# EAGLE board SparkFun_TensorFlow_Ambiq_Apollo3-Panel (EAGLE 9.4.2), part 1 of 4
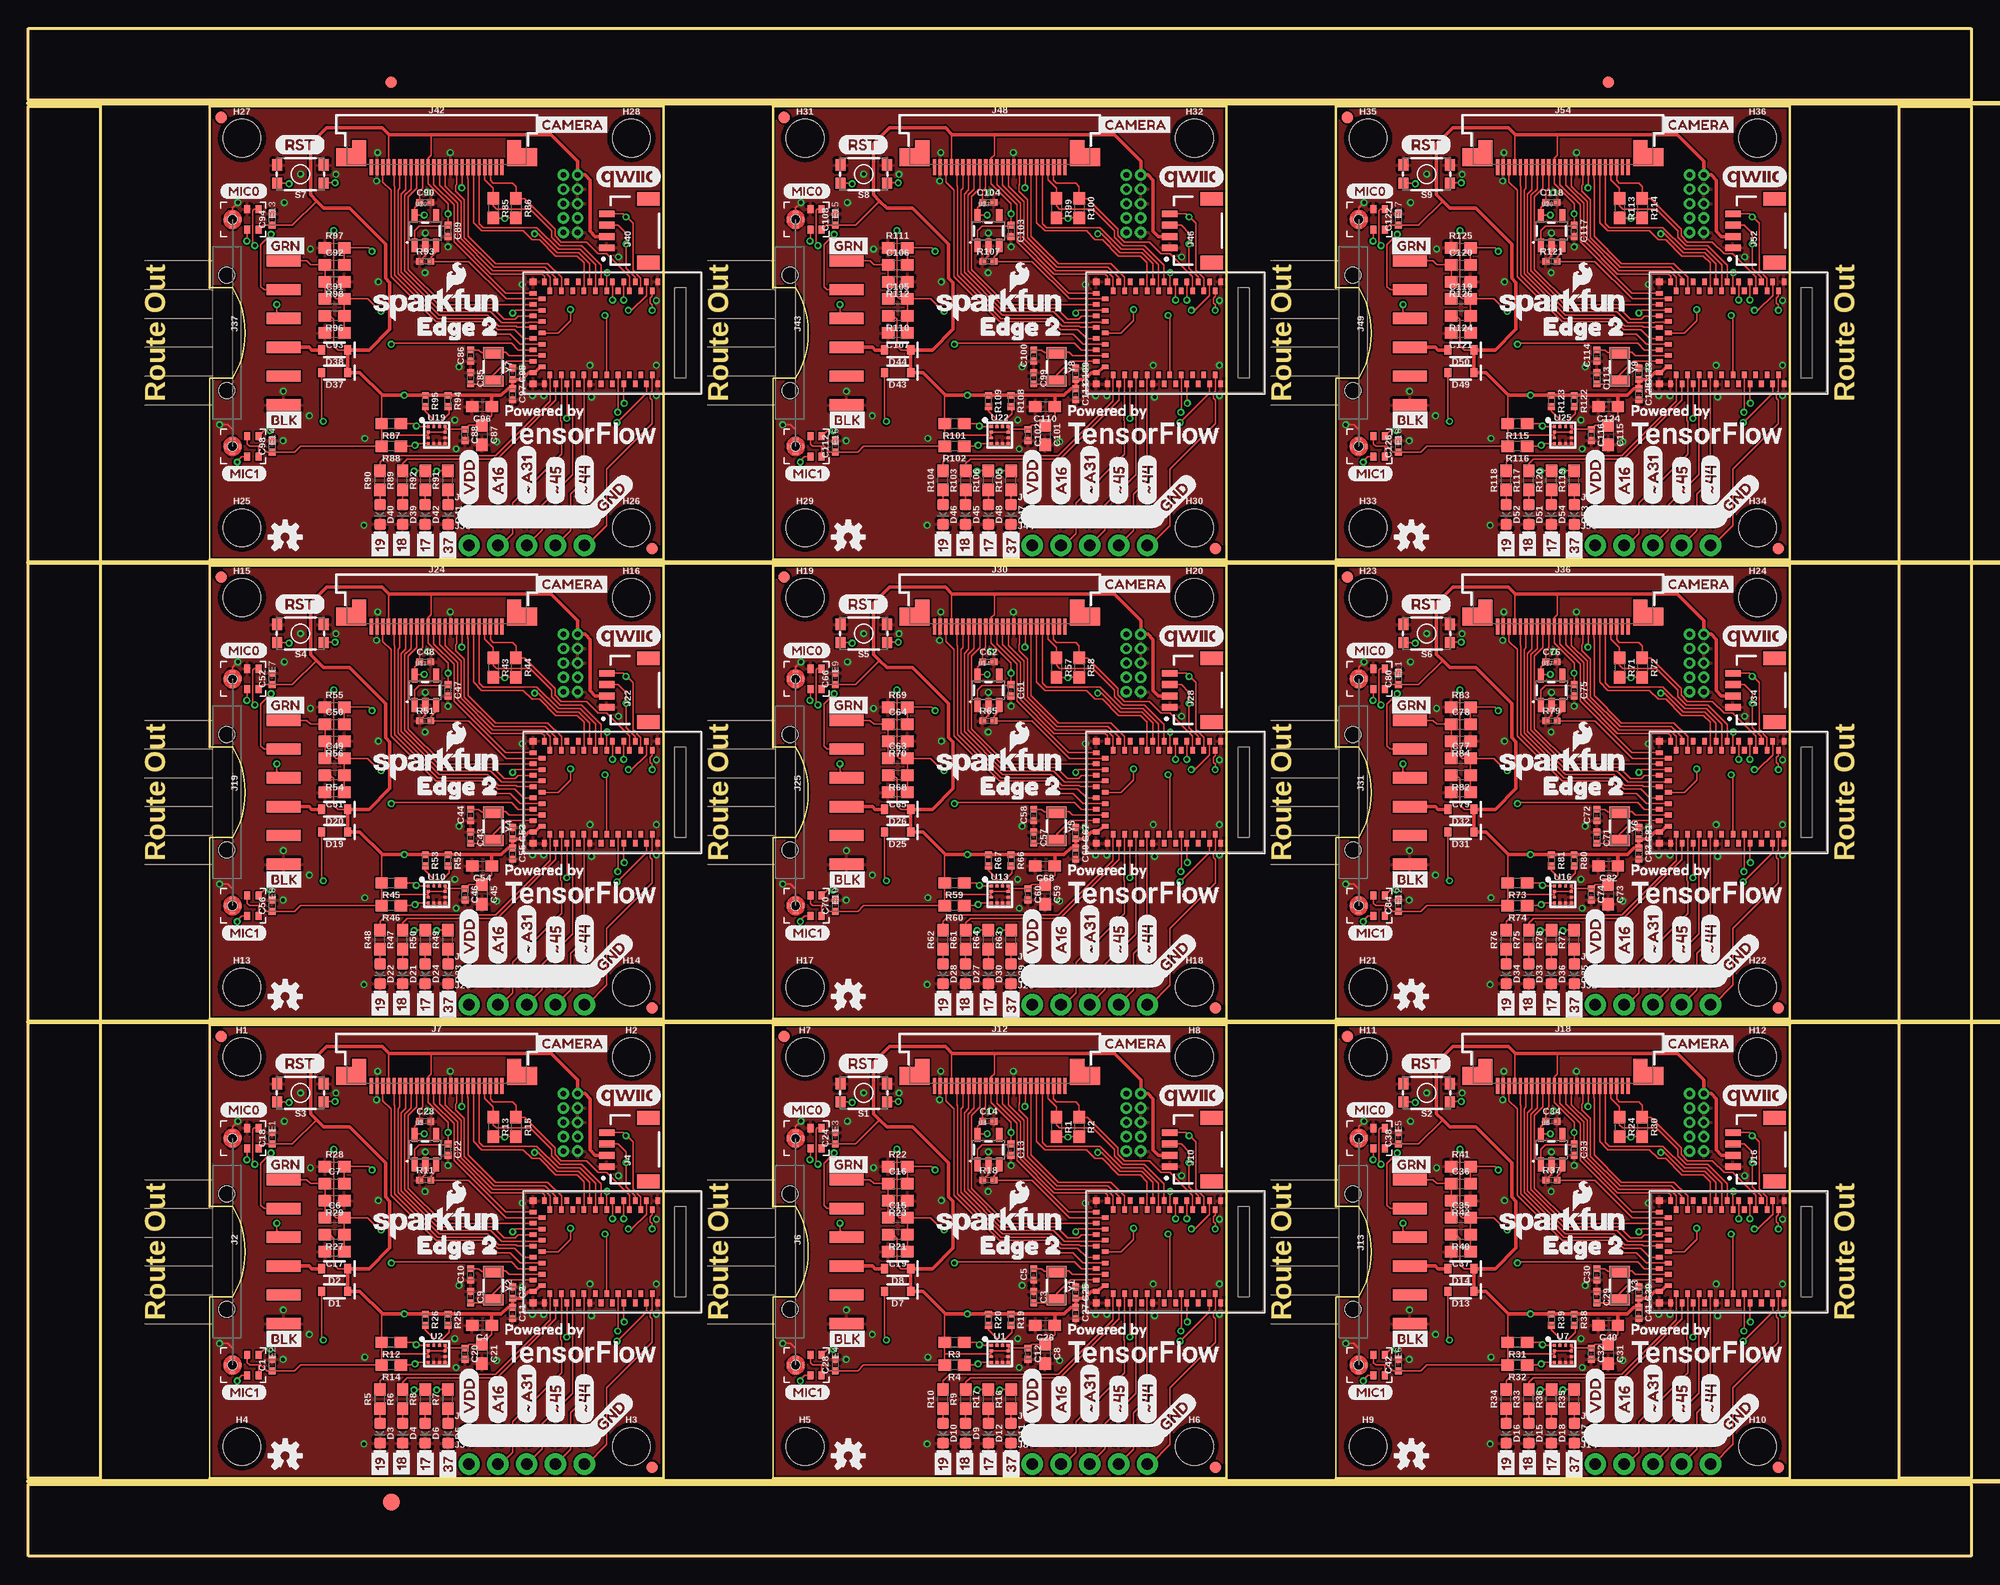
[diagram p0: board, top side]
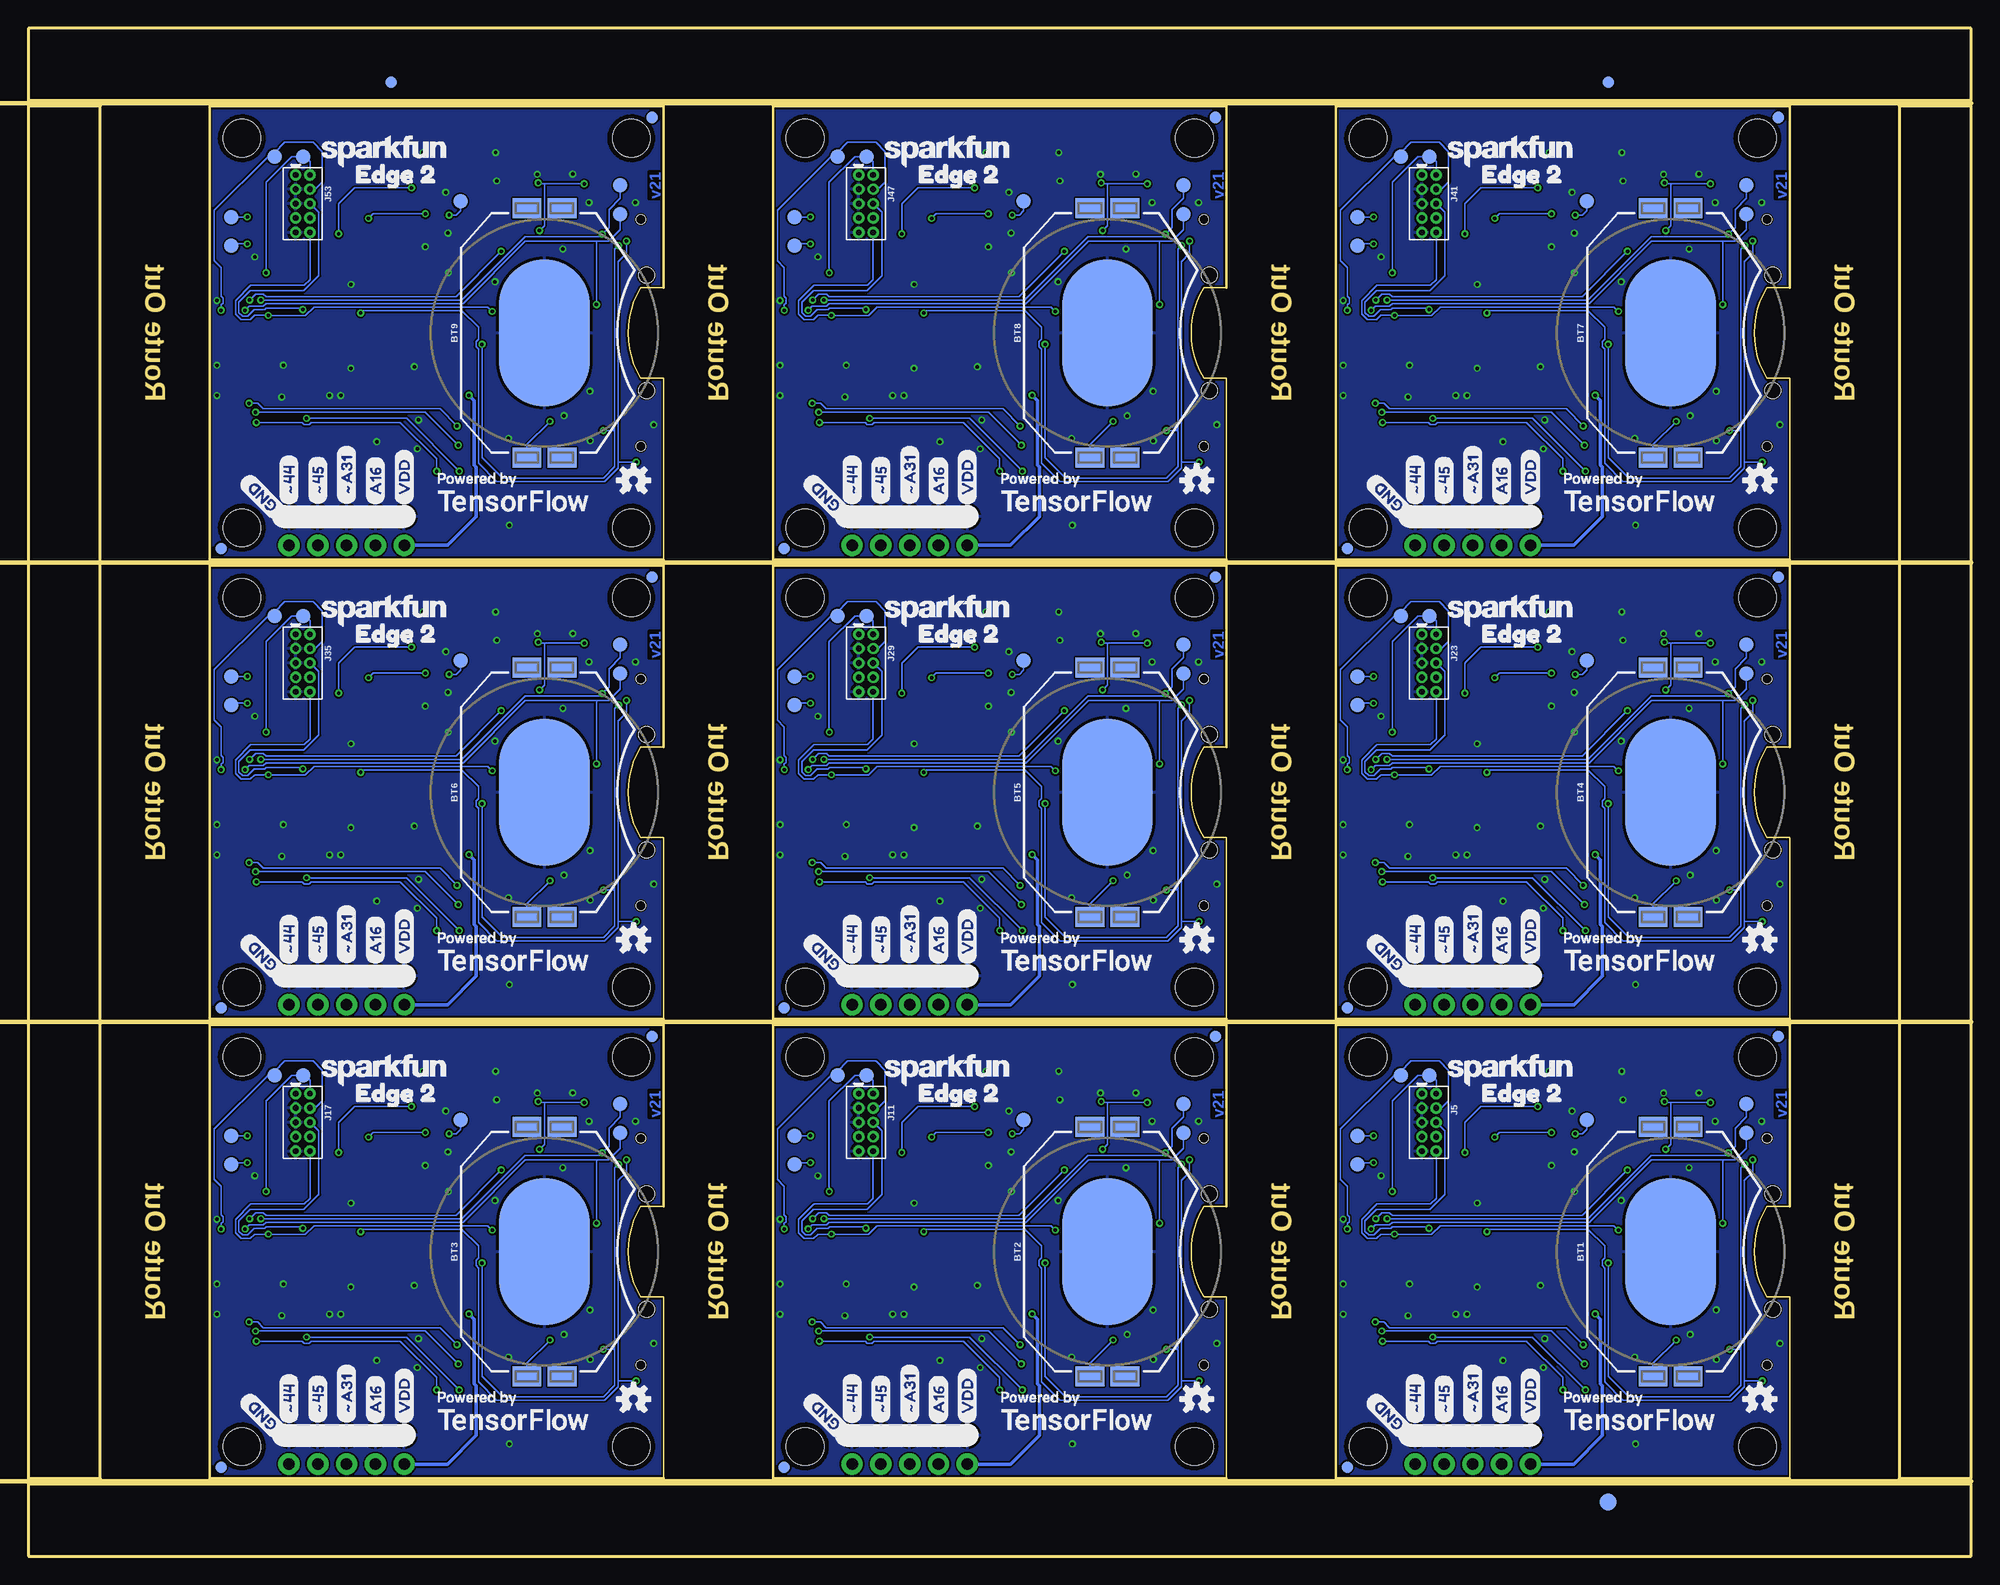
[diagram p1: board, bottom side, seen from below]

Size 171.31 x 134.73 mm. Coordinates in mm from the lower left corner, seen from the top.
Outline: 16,6.86 56,6.86 56,46.86 16,46.86 16,30.86 18,30.86 arc-62 18,22.86 16,22.86 16,6.86
Outline: 65.65,6.86 105.65,6.86 105.65,46.86 65.65,46.86 65.65,30.86 67.65,30.86 arc-62 67.65,22.86 65.65,22.86 65.65,6.86
Outline: 115.31,6.86 155.31,6.86 155.31,46.86 115.31,46.86 115.31,30.86 117.31,30.86 arc-62 117.31,22.86 115.31,22.86 115.31,6.86
Outline: 16,47.37 56,47.37 56,87.37 16,87.37 16,71.37 18,71.37 arc-62 18,63.37 16,63.37 16,47.37
Outline: 65.65,47.37 105.65,47.37 105.65,87.37 65.65,87.37 65.65,71.37 67.65,71.37 arc-62 67.65,63.37 65.65,63.37 65.65,47.37
Outline: 115.31,47.37 155.31,47.37 155.31,87.37 115.31,87.37 115.31,71.37 117.31,71.37 arc-62 117.31,63.37 115.31,63.37 115.31,47.37
Outline: 16,87.87 56,87.87 56,127.87 16,127.87 16,111.87 18,111.87 arc-62 18,103.87 16,103.87 16,87.87
Outline: 65.65,87.87 105.65,87.87 105.65,127.87 65.65,127.87 65.65,111.87 67.65,111.87 arc-62 67.65,103.87 65.65,103.87 65.65,87.87
Outline: 115.31,87.87 155.31,87.87 155.31,127.87 115.31,127.87 115.31,111.87 117.31,111.87 arc-62 117.31,103.87 115.31,103.87 115.31,87.87
Outline: 0,6.35 171.31,6.35 171.31,0 0,0 0,6.35
Outline: 164.96,127.87 171.31,127.87 171.31,6.86 164.96,6.86 164.96,127.87
Outline: 0,134.73 171.31,134.73 171.31,128.38 0,128.38 0,134.73
Outline: 0,127.87 6.35,127.87 6.35,6.86 0,6.86 0,127.87
Copper layers (1*16): Top 0.035mm / dielectric 1.5mm / Bottom 0.035mm
Design rules "SparkFun-2-layer-PCBWay-LIMIT": minimum track width 6mil, minimum drill 0.3mm, track to track 6mil, track to pad 6mil, pad to pad 6mil, via to via 6mil, smd to smd 6mil, copper to edge 6mil, drill to drill 6mil, minimum pad ring 6mil, minimum via ring 6mil, stop-mask expansion 4mil, vias tented up to drill 25mil, thermal gap 10mil
Net classes: 0 default: width 0 mm, drill 0 mm
Milling: 4 lines

## Footprints (pad centres in the part's own frame; a part is rotated, then mirrored left to right if it is on the bottom)
BATTCON_20MM_4LEGS_OVERPASTE_INNER = smd 1.778 x 2.54: 1 -11,1.55; 3 11,1.55; P$1 -11,-1.55; P$2 11,-1.55 | smd 13 x 8: 2 0,0
0402-TIGHT = smd 0.6 x 0.6: 1 -0.5,0; 2 0.5,0
0603 = smd 1.1 x 1: 1 -0.85,0; 2 0.85,0
SOD-323 = smd 0.63 x 0.83: A 1.15,0; C -1.15,0
LED-0603 = smd 1 x 1: A -0.877,0; C 0.877,0
SPH0641LM4H-1_MICROPHONE = smd 0.725 x 0.522: 1 -0.9,1.3; 2 -0.9,0.3; 4 0.9,0.3; 5 0.9,1.3 | smd 0.5 x 0.2: 3 0,-1.65; 8 0,-0.35 | smd 0.2 x 0.5: 6 -0.65,-1; 7 0.65,-1 | hole 0.8: 0,-1
FIDUCIAL-1X2 = smd 1 x 1: 1 0,0
FIDUCIAL-1.5X3 = smd 1.5 x 1.5: 1 0,0
STAND-OFF = hole 3.302: 0,0
1X05_NO_SILK = drill 1.016 pad 1.88: 1 0,0; 2 2.54,0; 3 5.08,0; 4 7.62,0; 5 10.16,0
1X06-SMD_RA_MALE = smd 1 x 3: 1 -6.35,5; 2 -3.81,5; 3 -1.27,5; 4 1.27,5; 5 3.81,5; 6 6.35,5 | hole 1.4: -5.08,0; 5.08,0
JST04_1MM_RA = smd 0.6 x 1.35: 1 -1.5,0; 2 -0.5,0; 3 0.5,0; 4 1.5,0 | smd 1.2 x 2: NC1 2.8,-3.675; NC2 -2.8,-3.675
2X5-PTH-1.27MM = drill 0.508 pad 1: 1 -2.54,-0.635; 2 -2.54,0.635; 3 -1.27,-0.635; 4 -1.27,0.635; 5 0,-0.635; 6 0,0.635; 7 1.27,-0.635; 8 1.27,0.635; 9 2.54,-0.635; 10 2.54,0.635
FPC-24-AMPHENOL-SFV24R-1STE1HLF = smd 0.3 x 1.4: 1 5.75,2.4; 2 5.25,2.4; 3 4.75,2.4; 4 4.25,2.4; 5 3.75,2.4; 6 3.25,2.4; 7 2.75,2.4; 8 2.25,2.4; 9 1.75,2.4; 10 1.25,2.4; 11 0.75,2.4; 12 0.25,2.4; 13 -0.25,2.4; 14 -0.75,2.4; 15 -1.25,2.4; 16 -1.75,2.4; 17 -2.25,2.4; 18 -2.75,2.4; 19 -3.25,2.4; 20 -3.75,2.4; 21 -4.25,2.4; 22 -4.75,2.4; 23 -5.25,2.4; 24 -5.75,2.4 | smd 1.4 x 1.6: MNT1@0 -8.15,1.5; MNT2@1 8.15,1.5 | smd 1.25 x 2.3: MNT1@1 -6.825,1.15; MNT2@0 6.825,1.15
TACTILE_SWITCH_SMD_4.6X2.8MM = smd 0.9 x 1: 1 -2.05,-0.8; 2 2.05,-0.8; 3 2.05,0.8; 4 -2.05,0.8
PAD.03X.05 = smd 1.27 x 1.27: P$1 0,0
LGA-12-LISDH12 = smd 0.275 x 0.25: 1 -0.75,0.75; 2 -0.75,0.25; 3 -0.75,-0.25; 4 -0.75,-0.75; 7 0.75,-0.75; 8 0.75,-0.25; 9 0.75,0.25; 10 0.75,0.75 | smd 0.25 x 0.275: 5 -0.25,-0.75; 6 0.25,-0.75; 11 0.25,0.75; 12 -0.25,0.75
SOT23-5 = smd 0.55 x 1.2: 1 -0.95,-1.3; 2 0,-1.3; 3 0.95,-1.3; 4 0.95,1.3; 5 -0.95,1.3
ARTEMIS_FP = smd 0.4 x 0.6: AD16 -4,-3.7; BOOT 1.5,4.5; D0 0.5,-4.5; D1 -0.5,-4.5; D2 -1,-3.7; D3 2,-3.7; D7 -1.5,4.5; D8 -0.5,4.5; D9 2,3.7; D10 1,3.7; D14 -5,3.7; D17 -3.5,-4.5; D36 2.5,-4.5; D38 3,-3.7; D40 2.5,4.5; D41 -2.5,-4.5; GND@1 4.5,4.5; GND@39 -5.5,-4.5; GND@47 -1.5,-4.5; GND@59 4.5,-4.5; RXI-0 3.5,4.5; SWDCK 4,3.7; SWDIO 0,3.7; TXO-0 0.5,4.5; ~AD31 -3,-3.7; ~AD35 -2,3.7; ~D4 -2.5,4.5; ~D5 -1,3.7; ~D18 -4.5,-4.5; ~D19 -5,-3.7; ~D22 -3.5,4.5; ~D23 -4,3.7; ~D24 -3,3.7; ~D27 -4.5,4.5; ~D28 -5.5,4.5; ~D37 3.5,-4.5; ~D39 3,3.7; ~D42 1.5,-4.5; ~D43 1,-3.7; ~D44 4,-3.7; ~D45 -2,-3.7; ~RST 0,-3.7 | smd 0.6 x 0.4: AD34 -6.5,-0.5; D15 -6.5,0.5; VDD@36 -5.7,-3; VDD@37 -6.5,-3.5; XI -6.5,-2.5; XO -5.7,-2; ~AD11 -5.7,-1; ~AD12 -5.7,2; ~AD13 -5.7,1; ~AD29 -6.5,-1.5; ~AD32 -5.7,3; ~AD33/SWO -5.7,0; ~D6 -6.5,3.5; ~D25 -6.5,2.5; ~D26 -6.5,1.5 | smd 0.6 x 0.6: GND@22 -6.5,4.5; GND@38 -6.5,-4.5
CRYSTAL-SMD-3.2X1.5MM = smd 1 x 1.8: P$1 -1.25,0; P$2 1.25,0

## Placement (x,y rotation side)
BT1  [BATTCON_20MM_4LEGS_OVERPASTE_INNER]  26.5,26.86 90 bottom
BT2  [BATTCON_20MM_4LEGS_OVERPASTE_INNER]  76.15,26.86 90 bottom
BT3  [BATTCON_20MM_4LEGS_OVERPASTE_INNER]  125.81,26.86 90 bottom
BT4  [BATTCON_20MM_4LEGS_OVERPASTE_INNER]  26.5,67.37 90 bottom
BT5  [BATTCON_20MM_4LEGS_OVERPASTE_INNER]  76.15,67.37 90 bottom
BT6  [BATTCON_20MM_4LEGS_OVERPASTE_INNER]  125.81,67.37 90 bottom
BT7  [BATTCON_20MM_4LEGS_OVERPASTE_INNER]  26.5,107.87 90 bottom
BT8  [BATTCON_20MM_4LEGS_OVERPASTE_INNER]  76.15,107.87 90 bottom
BT9  [BATTCON_20MM_4LEGS_OVERPASTE_INNER]  125.81,107.87 90 bottom
C1  0.1uF  [0402-TIGHT]  21.5,16.86 90 top
C2  0.1uF  [0402-TIGHT]  42.7,23.26 270 top
C3  15pF  [0402-TIGHT]  88.65,22.86 270 top
C4  10uF  [0603]  40,20.36 180 top
C5  15pF  [0402-TIGHT]  88.65,24.86 90 top
C6  0.1uF  [0603]  27,29.86 0 top
C7  2.2uF  [0603]  27,32.86 0 top
C8  10uF  [0603]  89.65,17.86 270 top
C9  15pF  [0402-TIGHT]  39,22.86 270 top
C10  15pF  [0402-TIGHT]  39,24.86 90 top
C11  1.0uF  [0402-TIGHT]  42.7,21.46 270 top
C12  0.1uF  [0402-TIGHT]  88.15,17.86 270 top
C13  1.0uF  [0402-TIGHT]  86.65,35.86 270 top
C14  1.0uF  [0402-TIGHT]  84.65,38.36 0 top
C15  0.1uF  [0603]  76.65,29.86 0 top
C16  2.2uF  [0603]  76.65,32.86 0 top
C17  1nF  [0603]  27,26.86 180 top
C18  0.1uF  [0402-TIGHT]  21.5,36.86 90 top
C19  1nF  [0603]  76.65,26.86 180 top
C20  0.1uF  [0402-TIGHT]  38.5,17.86 270 top
C21  10uF  [0603]  40,17.86 270 top
C22  1.0uF  [0402-TIGHT]  37,35.86 270 top
C23  1.0uF  [0402-TIGHT]  35,38.36 0 top
C24  0.1uF  [0402-TIGHT]  71.15,36.86 90 top
C25  0.1uF  [0402-TIGHT]  92.35,23.26 270 top
C26  10uF  [0603]  89.65,20.36 180 top
C27  1.0uF  [0402-TIGHT]  92.35,21.46 270 top
C28  0.1uF  [0402-TIGHT]  71.15,16.86 90 top
C29  15pF  [0402-TIGHT]  138.31,22.86 270 top
C30  15pF  [0402-TIGHT]  138.31,24.86 90 top
C31  10uF  [0603]  139.31,17.86 270 top
C32  0.1uF  [0402-TIGHT]  137.81,17.86 270 top
C33  1.0uF  [0402-TIGHT]  136.31,35.86 270 top
C34  1.0uF  [0402-TIGHT]  134.31,38.36 0 top
C35  0.1uF  [0603]  126.31,29.86 0 top
C36  2.2uF  [0603]  126.31,32.86 0 top
C37  1nF  [0603]  126.31,26.86 180 top
C38  0.1uF  [0402-TIGHT]  120.81,36.86 90 top
C39  0.1uF  [0402-TIGHT]  142.01,23.26 270 top
C40  10uF  [0603]  139.31,20.36 180 top
C41  1.0uF  [0402-TIGHT]  142.01,21.46 270 top
C42  0.1uF  [0402-TIGHT]  120.81,16.86 90 top
C43  15pF  [0402-TIGHT]  39,63.37 270 top
C44  15pF  [0402-TIGHT]  39,65.37 90 top
C45  10uF  [0603]  40,58.37 270 top
C46  0.1uF  [0402-TIGHT]  38.5,58.37 270 top
C47  1.0uF  [0402-TIGHT]  37,76.37 270 top
C48  1.0uF  [0402-TIGHT]  35,78.87 0 top
C49  0.1uF  [0603]  27,70.37 0 top
C50  2.2uF  [0603]  27,73.37 0 top
C51  1nF  [0603]  27,67.37 180 top
C52  0.1uF  [0402-TIGHT]  21.5,77.37 90 top
C53  0.1uF  [0402-TIGHT]  42.7,63.77 270 top
C54  10uF  [0603]  40,60.87 180 top
C55  1.0uF  [0402-TIGHT]  42.7,61.97 270 top
C56  0.1uF  [0402-TIGHT]  21.5,57.37 90 top
C57  15pF  [0402-TIGHT]  88.65,63.37 270 top
C58  15pF  [0402-TIGHT]  88.65,65.37 90 top
C59  10uF  [0603]  89.65,58.37 270 top
C60  0.1uF  [0402-TIGHT]  88.15,58.37 270 top
C61  1.0uF  [0402-TIGHT]  86.65,76.37 270 top
C62  1.0uF  [0402-TIGHT]  84.65,78.87 0 top
C63  0.1uF  [0603]  76.65,70.37 0 top
C64  2.2uF  [0603]  76.65,73.37 0 top
C65  1nF  [0603]  76.65,67.37 180 top
C66  0.1uF  [0402-TIGHT]  71.15,77.37 90 top
C67  0.1uF  [0402-TIGHT]  92.35,63.77 270 top
C68  10uF  [0603]  89.65,60.87 180 top
C69  1.0uF  [0402-TIGHT]  92.35,61.97 270 top
C70  0.1uF  [0402-TIGHT]  71.15,57.37 90 top
C71  15pF  [0402-TIGHT]  138.31,63.37 270 top
C72  15pF  [0402-TIGHT]  138.31,65.37 90 top
C73  10uF  [0603]  139.31,58.37 270 top
C74  0.1uF  [0402-TIGHT]  137.81,58.37 270 top
C75  1.0uF  [0402-TIGHT]  136.31,76.37 270 top
C76  1.0uF  [0402-TIGHT]  134.31,78.87 0 top
C77  0.1uF  [0603]  126.31,70.37 0 top
C78  2.2uF  [0603]  126.31,73.37 0 top
C79  1nF  [0603]  126.31,67.37 180 top
C80  0.1uF  [0402-TIGHT]  120.81,77.37 90 top
C81  0.1uF  [0402-TIGHT]  142.01,63.77 270 top
C82  10uF  [0603]  139.31,60.87 180 top
C83  1.0uF  [0402-TIGHT]  142.01,61.97 270 top
C84  0.1uF  [0402-TIGHT]  120.81,57.37 90 top
C85  15pF  [0402-TIGHT]  39,103.87 270 top
C86  15pF  [0402-TIGHT]  39,105.87 90 top
C87  10uF  [0603]  40,98.87 270 top
C88  0.1uF  [0402-TIGHT]  38.5,98.87 270 top
C89  1.0uF  [0402-TIGHT]  37,116.87 270 top
C90  1.0uF  [0402-TIGHT]  35,119.37 0 top
C91  0.1uF  [0603]  27,110.87 0 top
C92  2.2uF  [0603]  27,113.87 0 top
C93  1nF  [0603]  27,107.87 180 top
C94  0.1uF  [0402-TIGHT]  21.5,117.87 90 top
C95  0.1uF  [0402-TIGHT]  42.7,104.27 270 top
C96  10uF  [0603]  40,101.37 180 top
C97  1.0uF  [0402-TIGHT]  42.7,102.47 270 top
C98  0.1uF  [0402-TIGHT]  21.5,97.87 90 top
C99  15pF  [0402-TIGHT]  88.65,103.87 270 top
C100  15pF  [0402-TIGHT]  88.65,105.87 90 top
C101  10uF  [0603]  89.65,98.87 270 top
C102  0.1uF  [0402-TIGHT]  88.15,98.87 270 top
C103  1.0uF  [0402-TIGHT]  86.65,116.87 270 top
C104  1.0uF  [0402-TIGHT]  84.65,119.37 0 top
C105  0.1uF  [0603]  76.65,110.87 0 top
C106  2.2uF  [0603]  76.65,113.87 0 top
C107  1nF  [0603]  76.65,107.87 180 top
C108  0.1uF  [0402-TIGHT]  71.15,117.87 90 top
C109  0.1uF  [0402-TIGHT]  92.35,104.27 270 top
C110  10uF  [0603]  89.65,101.37 180 top
C111  1.0uF  [0402-TIGHT]  92.35,102.47 270 top
C112  0.1uF  [0402-TIGHT]  71.15,97.87 90 top
C113  15pF  [0402-TIGHT]  138.31,103.87 270 top
C114  15pF  [0402-TIGHT]  138.31,105.87 90 top
C115  10uF  [0603]  139.31,98.87 270 top
C116  0.1uF  [0402-TIGHT]  137.81,98.87 270 top
C117  1.0uF  [0402-TIGHT]  136.31,116.87 270 top
C118  1.0uF  [0402-TIGHT]  134.31,119.37 0 top
C119  0.1uF  [0603]  126.31,110.87 0 top
C120  2.2uF  [0603]  126.31,113.87 0 top
C121  1nF  [0603]  126.31,107.87 180 top
C122  0.1uF  [0402-TIGHT]  120.81,117.87 90 top
C123  0.1uF  [0402-TIGHT]  142.01,104.27 270 top
C124  10uF  [0603]  139.31,101.37 180 top
C125  1.0uF  [0402-TIGHT]  142.01,102.47 270 top
C126  0.1uF  [0402-TIGHT]  120.81,97.87 90 top
D1  1A/23V/620mV  [SOD-323]  27,23.36 180 top
D2  1A/23V/620mV  [SOD-323]  27,25.36 180 top
D3  RED  [LED-0603]  31,10.86 270 top
D4  BLUE  [LED-0603]  33,10.86 270 top
D5  Yellow  [LED-0603]  37,10.86 270 top
D6  GREEN  [LED-0603]  35,10.86 270 top
D7  1A/23V/620mV  [SOD-323]  76.65,23.36 180 top
D8  1A/23V/620mV  [SOD-323]  76.65,25.36 180 top
D9  BLUE  [LED-0603]  82.65,10.86 270 top
D10  RED  [LED-0603]  80.65,10.86 270 top
D11  Yellow  [LED-0603]  86.65,10.86 270 top
D12  GREEN  [LED-0603]  84.65,10.86 270 top
D13  1A/23V/620mV  [SOD-323]  126.31,23.36 180 top
D14  1A/23V/620mV  [SOD-323]  126.31,25.36 180 top
D15  BLUE  [LED-0603]  132.31,10.86 270 top
D16  RED  [LED-0603]  130.31,10.86 270 top
D17  Yellow  [LED-0603]  136.31,10.86 270 top
D18  GREEN  [LED-0603]  134.31,10.86 270 top
D19  1A/23V/620mV  [SOD-323]  27,63.87 180 top
D20  1A/23V/620mV  [SOD-323]  27,65.87 180 top
D21  BLUE  [LED-0603]  33,51.37 270 top
D22  RED  [LED-0603]  31,51.37 270 top
D23  Yellow  [LED-0603]  37,51.37 270 top
D24  GREEN  [LED-0603]  35,51.37 270 top
D25  1A/23V/620mV  [SOD-323]  76.65,63.87 180 top
D26  1A/23V/620mV  [SOD-323]  76.65,65.87 180 top
D27  BLUE  [LED-0603]  82.65,51.37 270 top
D28  RED  [LED-0603]  80.65,51.37 270 top
D29  Yellow  [LED-0603]  86.65,51.37 270 top
D30  GREEN  [LED-0603]  84.65,51.37 270 top
D31  1A/23V/620mV  [SOD-323]  126.31,63.87 180 top
D32  1A/23V/620mV  [SOD-323]  126.31,65.87 180 top
D33  BLUE  [LED-0603]  132.31,51.37 270 top
D34  RED  [LED-0603]  130.31,51.37 270 top
D35  Yellow  [LED-0603]  136.31,51.37 270 top
D36  GREEN  [LED-0603]  134.31,51.37 270 top
D37  1A/23V/620mV  [SOD-323]  27,104.37 180 top
D38  1A/23V/620mV  [SOD-323]  27,106.37 180 top
D39  BLUE  [LED-0603]  33,91.87 270 top
D40  RED  [LED-0603]  31,91.87 270 top
D41  Yellow  [LED-0603]  37,91.87 270 top
D42  GREEN  [LED-0603]  35,91.87 270 top
D43  1A/23V/620mV  [SOD-323]  76.65,104.37 180 top
D44  1A/23V/620mV  [SOD-323]  76.65,106.37 180 top
D45  BLUE  [LED-0603]  82.65,91.87 270 top
D46  RED  [LED-0603]  80.65,91.87 270 top
D47  Yellow  [LED-0603]  86.65,91.87 270 top
D48  GREEN  [LED-0603]  84.65,91.87 270 top
D49  1A/23V/620mV  [SOD-323]  126.31,104.37 180 top
D50  1A/23V/620mV  [SOD-323]  126.31,106.37 180 top
D51  BLUE  [LED-0603]  132.31,91.87 270 top
D52  RED  [LED-0603]  130.31,91.87 270 top
D53  Yellow  [LED-0603]  136.31,91.87 270 top
D54  GREEN  [LED-0603]  134.31,91.87 270 top
E1  SPH0641LM4H-1  [SPH0641LM4H-1_MICROPHONE]  19,36.86 270 top
E2  SPH0641LM4H-1  [SPH0641LM4H-1_MICROPHONE]  19,16.86 270 top
E3  SPH0641LM4H-1  [SPH0641LM4H-1_MICROPHONE]  68.65,36.86 270 top
E4  SPH0641LM4H-1  [SPH0641LM4H-1_MICROPHONE]  68.65,16.86 270 top
E5  SPH0641LM4H-1  [SPH0641LM4H-1_MICROPHONE]  118.31,36.86 270 top
E6  SPH0641LM4H-1  [SPH0641LM4H-1_MICROPHONE]  118.31,16.86 270 top
E7  SPH0641LM4H-1  [SPH0641LM4H-1_MICROPHONE]  19,77.37 270 top
E8  SPH0641LM4H-1  [SPH0641LM4H-1_MICROPHONE]  19,57.37 270 top
E9  SPH0641LM4H-1  [SPH0641LM4H-1_MICROPHONE]  68.65,77.37 270 top
E10  SPH0641LM4H-1  [SPH0641LM4H-1_MICROPHONE]  68.65,57.37 270 top
E11  SPH0641LM4H-1  [SPH0641LM4H-1_MICROPHONE]  118.31,77.37 270 top
E12  SPH0641LM4H-1  [SPH0641LM4H-1_MICROPHONE]  118.31,57.37 270 top
E13  SPH0641LM4H-1  [SPH0641LM4H-1_MICROPHONE]  19,117.87 270 top
E14  SPH0641LM4H-1  [SPH0641LM4H-1_MICROPHONE]  19,97.87 270 top
E15  SPH0641LM4H-1  [SPH0641LM4H-1_MICROPHONE]  68.65,117.87 270 top
E16  SPH0641LM4H-1  [SPH0641LM4H-1_MICROPHONE]  68.65,97.87 270 top
E17  SPH0641LM4H-1  [SPH0641LM4H-1_MICROPHONE]  118.31,117.87 270 top
E18  SPH0641LM4H-1  [SPH0641LM4H-1_MICROPHONE]  118.31,97.87 270 top
E$1  [FIDUCIAL-1X2]  32,129.97 0 top
E$2  [FIDUCIAL-1X2]  32,129.97 0 bottom
E$3  [FIDUCIAL-1X2]  139.3,129.97 0 top
E$4  [FIDUCIAL-1X2]  139.3,129.97 0 bottom
E$5  [FIDUCIAL-1.5X3]  32,4.76 0 top
E$6  [FIDUCIAL-1.5X3]  32,4.76 0 bottom
FD1  FIDUCIAL1X2  [FIDUCIAL-1X2]  17,45.86 0 top
FD2  FIDUCIAL1X2  [FIDUCIAL-1X2]  55,7.86 0 top
FD3  FIDUCIAL1X2  [FIDUCIAL-1X2]  55,7.86 0 bottom
FD4  FIDUCIAL1X2  [FIDUCIAL-1X2]  17,45.86 0 bottom
FD5  FIDUCIAL1X2  [FIDUCIAL-1X2]  66.65,45.86 0 bottom
FD6  FIDUCIAL1X2  [FIDUCIAL-1X2]  104.65,7.86 0 bottom
FD7  FIDUCIAL1X2  [FIDUCIAL-1X2]  66.65,45.86 0 top
FD8  FIDUCIAL1X2  [FIDUCIAL-1X2]  104.65,7.86 0 top
FD9  FIDUCIAL1X2  [FIDUCIAL-1X2]  116.31,45.86 0 bottom
FD10  FIDUCIAL1X2  [FIDUCIAL-1X2]  154.31,7.86 0 bottom
FD11  FIDUCIAL1X2  [FIDUCIAL-1X2]  116.31,45.86 0 top
FD12  FIDUCIAL1X2  [FIDUCIAL-1X2]  154.31,7.86 0 top
FD13  FIDUCIAL1X2  [FIDUCIAL-1X2]  17,86.37 0 bottom
FD14  FIDUCIAL1X2  [FIDUCIAL-1X2]  55,48.37 0 bottom
FD15  FIDUCIAL1X2  [FIDUCIAL-1X2]  17,86.37 0 top
FD16  FIDUCIAL1X2  [FIDUCIAL-1X2]  55,48.37 0 top
FD17  FIDUCIAL1X2  [FIDUCIAL-1X2]  66.65,86.37 0 bottom
FD18  FIDUCIAL1X2  [FIDUCIAL-1X2]  104.65,48.37 0 bottom
FD19  FIDUCIAL1X2  [FIDUCIAL-1X2]  66.65,86.37 0 top
FD20  FIDUCIAL1X2  [FIDUCIAL-1X2]  104.65,48.37 0 top
FD21  FIDUCIAL1X2  [FIDUCIAL-1X2]  116.31,86.37 0 bottom
FD22  FIDUCIAL1X2  [FIDUCIAL-1X2]  154.31,48.37 0 bottom
FD23  FIDUCIAL1X2  [FIDUCIAL-1X2]  116.31,86.37 0 top
FD24  FIDUCIAL1X2  [FIDUCIAL-1X2]  154.31,48.37 0 top
FD25  FIDUCIAL1X2  [FIDUCIAL-1X2]  17,126.87 0 bottom
FD26  FIDUCIAL1X2  [FIDUCIAL-1X2]  55,88.87 0 bottom
FD27  FIDUCIAL1X2  [FIDUCIAL-1X2]  17,126.87 0 top
FD28  FIDUCIAL1X2  [FIDUCIAL-1X2]  55,88.87 0 top
FD29  FIDUCIAL1X2  [FIDUCIAL-1X2]  66.65,126.87 0 bottom
FD30  FIDUCIAL1X2  [FIDUCIAL-1X2]  104.65,88.87 0 bottom
FD31  FIDUCIAL1X2  [FIDUCIAL-1X2]  66.65,126.87 0 top
FD32  FIDUCIAL1X2  [FIDUCIAL-1X2]  104.65,88.87 0 top
FD33  FIDUCIAL1X2  [FIDUCIAL-1X2]  116.31,126.87 0 bottom
FD34  FIDUCIAL1X2  [FIDUCIAL-1X2]  154.31,88.87 0 bottom
FD35  FIDUCIAL1X2  [FIDUCIAL-1X2]  116.31,126.87 0 top
FD36  FIDUCIAL1X2  [FIDUCIAL-1X2]  154.31,88.87 0 top
FRAME1  FRAME-LETTER  [CREATIVE_COMMONS]  17,-6.14 0 top  (outside the outline)
FRAME2  FRAME-LETTERNO_PACKAGE  [DUMMY]  17,-6.14 0 top  (outside the outline)
FRAME3  FRAME-LETTER  [CREATIVE_COMMONS]  66.65,-6.14 0 top  (outside the outline)
FRAME4  FRAME-LETTERNO_PACKAGE  [DUMMY]  66.65,-6.14 0 top  (outside the outline)
FRAME5  FRAME-LETTER  [CREATIVE_COMMONS]  116.31,-6.14 0 top  (outside the outline)
FRAME6  FRAME-LETTERNO_PACKAGE  [DUMMY]  116.31,-6.14 0 top  (outside the outline)
FRAME7  FRAME-LETTER  [CREATIVE_COMMONS]  17,34.37 0 top
FRAME8  FRAME-LETTERNO_PACKAGE  [DUMMY]  17,34.37 0 top
FRAME9  FRAME-LETTER  [CREATIVE_COMMONS]  66.65,34.37 0 top
FRAME10  FRAME-LETTERNO_PACKAGE  [DUMMY]  66.65,34.37 0 top
FRAME11  FRAME-LETTER  [CREATIVE_COMMONS]  116.31,34.37 0 top
FRAME12  FRAME-LETTERNO_PACKAGE  [DUMMY]  116.31,34.37 0 top
FRAME13  FRAME-LETTER  [CREATIVE_COMMONS]  17,74.87 0 top
FRAME14  FRAME-LETTERNO_PACKAGE  [DUMMY]  17,74.87 0 top
FRAME15  FRAME-LETTER  [CREATIVE_COMMONS]  66.65,74.87 0 top
FRAME16  FRAME-LETTERNO_PACKAGE  [DUMMY]  66.65,74.87 0 top
FRAME17  FRAME-LETTER  [CREATIVE_COMMONS]  116.31,74.87 0 top
FRAME18  FRAME-LETTERNO_PACKAGE  [DUMMY]  116.31,74.87 0 top
H1  STAND-OFF  [STAND-OFF]  18.83,44.03 0 top
H2  STAND-OFF  [STAND-OFF]  53.17,44.03 0 top
H3  STAND-OFF  [STAND-OFF]  53.17,9.69 0 top
H4  STAND-OFF  [STAND-OFF]  18.83,9.69 0 top
H5  STAND-OFF  [STAND-OFF]  68.48,9.69 0 top
H6  STAND-OFF  [STAND-OFF]  102.83,9.69 0 top
H7  STAND-OFF  [STAND-OFF]  68.48,44.03 0 top
H8  STAND-OFF  [STAND-OFF]  102.83,44.03 0 top
H9  STAND-OFF  [STAND-OFF]  118.13,9.69 0 top
H10  STAND-OFF  [STAND-OFF]  152.48,9.69 0 top
H11  STAND-OFF  [STAND-OFF]  118.13,44.03 0 top
H12  STAND-OFF  [STAND-OFF]  152.48,44.03 0 top
H13  STAND-OFF  [STAND-OFF]  18.83,50.19 0 top
H14  STAND-OFF  [STAND-OFF]  53.17,50.19 0 top
H15  STAND-OFF  [STAND-OFF]  18.83,84.54 0 top
H16  STAND-OFF  [STAND-OFF]  53.17,84.54 0 top
H17  STAND-OFF  [STAND-OFF]  68.48,50.19 0 top
H18  STAND-OFF  [STAND-OFF]  102.83,50.19 0 top
H19  STAND-OFF  [STAND-OFF]  68.48,84.54 0 top
H20  STAND-OFF  [STAND-OFF]  102.83,84.54 0 top
H21  STAND-OFF  [STAND-OFF]  118.13,50.19 0 top
H22  STAND-OFF  [STAND-OFF]  152.48,50.19 0 top
H23  STAND-OFF  [STAND-OFF]  118.13,84.54 0 top
H24  STAND-OFF  [STAND-OFF]  152.48,84.54 0 top
H25  STAND-OFF  [STAND-OFF]  18.83,90.7 0 top
H26  STAND-OFF  [STAND-OFF]  53.17,90.7 0 top
H27  STAND-OFF  [STAND-OFF]  18.83,125.05 0 top
H28  STAND-OFF  [STAND-OFF]  53.17,125.05 0 top
H29  STAND-OFF  [STAND-OFF]  68.48,90.7 0 top
H30  STAND-OFF  [STAND-OFF]  102.83,90.7 0 top
H31  STAND-OFF  [STAND-OFF]  68.48,125.05 0 top
H32  STAND-OFF  [STAND-OFF]  102.83,125.05 0 top
H33  STAND-OFF  [STAND-OFF]  118.13,90.7 0 top
H34  STAND-OFF  [STAND-OFF]  152.48,90.7 0 top
H35  STAND-OFF  [STAND-OFF]  118.13,125.05 0 top
H36  STAND-OFF  [STAND-OFF]  152.48,125.05 0 top
J1  [1X05_NO_SILK]  38.86,10.67 0 top
J2  [1X06-SMD_RA_MALE]  17.5,26.86 270 top
J3  [1X05_NO_SILK]  38.86,8.13 0 top
J4  [JST04_1MM_RA]  51,35.86 90 top
J5  CORTEX_DEBUG  [2X5-PTH-1.27MM]  47.8,38.26 270 bottom
J6  [1X06-SMD_RA_MALE]  67.15,26.86 270 top
J7  CAMERA-HIMAX  [FPC-24-AMPHENOL-SFV24R-1STE1HLF]  36,43.86 180 top
J8  [1X05_NO_SILK]  88.51,8.13 0 top
J9  [1X05_NO_SILK]  88.51,10.67 0 top
J10  [JST04_1MM_RA]  100.65,35.86 90 top
J11  CORTEX_DEBUG  [2X5-PTH-1.27MM]  97.45,38.26 270 bottom
J12  CAMERA-HIMAX  [FPC-24-AMPHENOL-SFV24R-1STE1HLF]  85.65,43.86 180 top
J13  [1X06-SMD_RA_MALE]  116.81,26.86 270 top
J14  [1X05_NO_SILK]  138.17,8.13 0 top
J15  [1X05_NO_SILK]  138.17,10.67 0 top
J16  [JST04_1MM_RA]  150.31,35.86 90 top
J17  CORTEX_DEBUG  [2X5-PTH-1.27MM]  147.11,38.26 270 bottom
J18  CAMERA-HIMAX  [FPC-24-AMPHENOL-SFV24R-1STE1HLF]  135.31,43.86 180 top
J19  [1X06-SMD_RA_MALE]  17.5,67.37 270 top
J20  [1X05_NO_SILK]  38.86,48.64 0 top
J21  [1X05_NO_SILK]  38.86,51.18 0 top
J22  [JST04_1MM_RA]  51,76.37 90 top
J23  CORTEX_DEBUG  [2X5-PTH-1.27MM]  47.8,78.77 270 bottom
J24  CAMERA-HIMAX  [FPC-24-AMPHENOL-SFV24R-1STE1HLF]  36,84.37 180 top
J25  [1X06-SMD_RA_MALE]  67.15,67.37 270 top
J26  [1X05_NO_SILK]  88.51,48.64 0 top
J27  [1X05_NO_SILK]  88.51,51.18 0 top
J28  [JST04_1MM_RA]  100.65,76.37 90 top
J29  CORTEX_DEBUG  [2X5-PTH-1.27MM]  97.45,78.77 270 bottom
J30  CAMERA-HIMAX  [FPC-24-AMPHENOL-SFV24R-1STE1HLF]  85.65,84.37 180 top
J31  [1X06-SMD_RA_MALE]  116.81,67.37 270 top
J32  [1X05_NO_SILK]  138.17,48.64 0 top
J33  [1X05_NO_SILK]  138.17,51.18 0 top
J34  [JST04_1MM_RA]  150.31,76.37 90 top
J35  CORTEX_DEBUG  [2X5-PTH-1.27MM]  147.11,78.77 270 bottom
J36  CAMERA-HIMAX  [FPC-24-AMPHENOL-SFV24R-1STE1HLF]  135.31,84.37 180 top
J37  [1X06-SMD_RA_MALE]  17.5,107.87 270 top
J38  [1X05_NO_SILK]  38.86,89.14 0 top
J39  [1X05_NO_SILK]  38.86,91.68 0 top
J40  [JST04_1MM_RA]  51,116.87 90 top
J41  CORTEX_DEBUG  [2X5-PTH-1.27MM]  47.8,119.27 270 bottom
J42  CAMERA-HIMAX  [FPC-24-AMPHENOL-SFV24R-1STE1HLF]  36,124.87 180 top
J43  [1X06-SMD_RA_MALE]  67.15,107.87 270 top
J44  [1X05_NO_SILK]  88.51,89.14 0 top
J45  [1X05_NO_SILK]  88.51,91.68 0 top
J46  [JST04_1MM_RA]  100.65,116.87 90 top
J47  CORTEX_DEBUG  [2X5-PTH-1.27MM]  97.45,119.27 270 bottom
J48  CAMERA-HIMAX  [FPC-24-AMPHENOL-SFV24R-1STE1HLF]  85.65,124.87 180 top
J49  [1X06-SMD_RA_MALE]  116.81,107.87 270 top
J50  [1X05_NO_SILK]  138.17,89.14 0 top
J51  [1X05_NO_SILK]  138.17,91.68 0 top
J52  [JST04_1MM_RA]  150.31,116.87 90 top
J53  CORTEX_DEBUG  [2X5-PTH-1.27MM]  147.11,119.27 270 bottom
J54  CAMERA-HIMAX  [FPC-24-AMPHENOL-SFV24R-1STE1HLF]  135.31,124.87 180 top
LOGO1  SFE_LOGO_NAME_FLAME.1_INCH  [SFE_LOGO_NAME_FLAME_.1]  36,29.38 0 top
LOGO2  OSHW-LOGOS  [OSHW-LOGO-S]  22.64,8.86 0 top
LOGO3  SFE_LOGO_NAME_FLAME.1_INCH  [SFE_LOGO_NAME_FLAME_.1]  85.65,29.38 0 top
LOGO4  OSHW-LOGOS  [OSHW-LOGO-S]  72.29,8.86 0 top
LOGO5  SFE_LOGO_NAME_FLAME.1_INCH  [SFE_LOGO_NAME_FLAME_.1]  135.31,29.38 0 top
LOGO6  OSHW-LOGOS  [OSHW-LOGO-S]  121.95,8.86 0 top
LOGO7  SFE_LOGO_NAME_FLAME.1_INCH  [SFE_LOGO_NAME_FLAME_.1]  36,69.89 0 top
LOGO8  OSHW-LOGOS  [OSHW-LOGO-S]  22.64,49.37 0 top
LOGO9  SFE_LOGO_NAME_FLAME.1_INCH  [SFE_LOGO_NAME_FLAME_.1]  85.65,69.89 0 top
LOGO10  OSHW-LOGOS  [OSHW-LOGO-S]  72.29,49.37 0 top
LOGO11  SFE_LOGO_NAME_FLAME.1_INCH  [SFE_LOGO_NAME_FLAME_.1]  135.31,69.89 0 top
LOGO12  OSHW-LOGOS  [OSHW-LOGO-S]  121.95,49.37 0 top
LOGO13  SFE_LOGO_NAME_FLAME.1_INCH  [SFE_LOGO_NAME_FLAME_.1]  36,110.39 0 top
LOGO14  OSHW-LOGOS  [OSHW-LOGO-S]  22.64,89.87 0 top
LOGO15  SFE_LOGO_NAME_FLAME.1_INCH  [SFE_LOGO_NAME_FLAME_.1]  85.65,110.39 0 top
LOGO16  OSHW-LOGOS  [OSHW-LOGO-S]  72.29,89.87 0 top
LOGO17  SFE_LOGO_NAME_FLAME.1_INCH  [SFE_LOGO_NAME_FLAME_.1]  135.31,110.39 0 top
LOGO18  OSHW-LOGOS  [OSHW-LOGO-S]  121.95,89.87 0 top
R1  4.7k  [0603]  90.65,37.86 270 top
R2  4.7k  [0603]  92.65,37.86 270 top
R3  4.7k  [0603]  81.65,18.86 180 top
R4  4.7k  [0603]  81.65,16.86 180 top
R5  1k  [0603]  31,13.86 90 top
R6  1k  [0603]  33,13.86 90 top
R7  1k  [0603]  37,13.86 90 top
R8  1k  [0603]  35,13.86 90 top
R9  1k  [0603]  82.65,13.86 90 top
R10  1k  [0603]  80.65,13.86 90 top
R11  10k  [0402-TIGHT]  35,33.16 0 top
R12  4.7k  [0603]  32,18.86 180 top
R13  4.7k  [0603]  41,37.86 270 top
R14  4.7k  [0603]  32,16.86 180 top
R15  4.7k  [0603]  43,37.86 270 top
R16  1k  [0603]  86.65,13.86 90 top
R17  1k  [0603]  84.65,13.86 90 top
R18  10k  [0402-TIGHT]  84.65,33.16 0 top
R19  10k  [0402-TIGHT]  86.65,20.86 270 top
R20  10k  [0402-TIGHT]  84.65,20.86 270 top
R21  100k  [0603]  76.65,28.36 180 top
R22  10k  [0603]  76.65,34.36 0 top
R23  100k  [0603]  76.65,31.36 180 top
R24  4.7k  [0603]  140.31,37.86 270 top
R25  10k  [0402-TIGHT]  37,20.86 270 top
R26  10k  [0402-TIGHT]  35,20.86 270 top
R27  100k  [0603]  27,28.36 180 top
R28  10k  [0603]  27,34.36 0 top
R29  100k  [0603]  27,31.36 180 top
R30  4.7k  [0603]  142.31,37.86 270 top
R31  4.7k  [0603]  131.31,18.86 180 top
R32  4.7k  [0603]  131.31,16.86 180 top
R33  1k  [0603]  132.31,13.86 90 top
R34  1k  [0603]  130.31,13.86 90 top
R35  1k  [0603]  136.31,13.86 90 top
R36  1k  [0603]  134.31,13.86 90 top
R37  10k  [0402-TIGHT]  134.31,33.16 0 top
R38  10k  [0402-TIGHT]  136.31,20.86 270 top
R39  10k  [0402-TIGHT]  134.31,20.86 270 top
R40  100k  [0603]  126.31,28.36 180 top
R41  10k  [0603]  126.31,34.36 0 top
R42  100k  [0603]  126.31,31.36 180 top
R43  4.7k  [0603]  41,78.37 270 top
R44  4.7k  [0603]  43,78.37 270 top
R45  4.7k  [0603]  32,59.37 180 top
R46  4.7k  [0603]  32,57.37 180 top
R47  1k  [0603]  33,54.37 90 top
R48  1k  [0603]  31,54.37 90 top
R49  1k  [0603]  37,54.37 90 top
R50  1k  [0603]  35,54.37 90 top
R51  10k  [0402-TIGHT]  35,73.67 0 top
R52  10k  [0402-TIGHT]  37,61.37 270 top
R53  10k  [0402-TIGHT]  35,61.37 270 top
R54  100k  [0603]  27,68.87 180 top
R55  10k  [0603]  27,74.87 0 top
R56  100k  [0603]  27,71.87 180 top
R57  4.7k  [0603]  90.65,78.37 270 top
R58  4.7k  [0603]  92.65,78.37 270 top
R59  4.7k  [0603]  81.65,59.37 180 top
R60  4.7k  [0603]  81.65,57.37 180 top
R61  1k  [0603]  82.65,54.37 90 top
R62  1k  [0603]  80.65,54.37 90 top
R63  1k  [0603]  86.65,54.37 90 top
R64  1k  [0603]  84.65,54.37 90 top
R65  10k  [0402-TIGHT]  84.65,73.67 0 top
R66  10k  [0402-TIGHT]  86.65,61.37 270 top
R67  10k  [0402-TIGHT]  84.65,61.37 270 top
R68  100k  [0603]  76.65,68.87 180 top
R69  10k  [0603]  76.65,74.87 0 top
R70  100k  [0603]  76.65,71.87 180 top
R71  4.7k  [0603]  140.31,78.37 270 top
R72  4.7k  [0603]  142.31,78.37 270 top
R73  4.7k  [0603]  131.31,59.37 180 top
R74  4.7k  [0603]  131.31,57.37 180 top
R75  1k  [0603]  132.31,54.37 90 top
R76  1k  [0603]  130.31,54.37 90 top
R77  1k  [0603]  136.31,54.37 90 top
R78  1k  [0603]  134.31,54.37 90 top
R79  10k  [0402-TIGHT]  134.31,73.67 0 top
R80  10k  [0402-TIGHT]  136.31,61.37 270 top
R81  10k  [0402-TIGHT]  134.31,61.37 270 top
R82  100k  [0603]  126.31,68.87 180 top
R83  10k  [0603]  126.31,74.87 0 top
R84  100k  [0603]  126.31,71.87 180 top
R85  4.7k  [0603]  41,118.87 270 top
R86  4.7k  [0603]  43,118.87 270 top
R87  4.7k  [0603]  32,99.87 180 top
R88  4.7k  [0603]  32,97.87 180 top
R89  1k  [0603]  33,94.87 90 top
R90  1k  [0603]  31,94.87 90 top
R91  1k  [0603]  37,94.87 90 top
R92  1k  [0603]  35,94.87 90 top
R93  10k  [0402-TIGHT]  35,114.17 0 top
R94  10k  [0402-TIGHT]  37,101.87 270 top
R95  10k  [0402-TIGHT]  35,101.87 270 top
R96  100k  [0603]  27,109.37 180 top
R97  10k  [0603]  27,115.37 0 top
R98  100k  [0603]  27,112.37 180 top
R99  4.7k  [0603]  90.65,118.87 270 top
R100  4.7k  [0603]  92.65,118.87 270 top
R101  4.7k  [0603]  81.65,99.87 180 top
R102  4.7k  [0603]  81.65,97.87 180 top
R103  1k  [0603]  82.65,94.87 90 top
R104  1k  [0603]  80.65,94.87 90 top
R105  1k  [0603]  86.65,94.87 90 top
R106  1k  [0603]  84.65,94.87 90 top
R107  10k  [0402-TIGHT]  84.65,114.17 0 top
R108  10k  [0402-TIGHT]  86.65,101.87 270 top
R109  10k  [0402-TIGHT]  84.65,101.87 270 top
R110  100k  [0603]  76.65,109.37 180 top
R111  10k  [0603]  76.65,115.37 0 top
R112  100k  [0603]  76.65,112.37 180 top
R113  4.7k  [0603]  140.31,118.87 270 top
R114  4.7k  [0603]  142.31,118.87 270 top
R115  4.7k  [0603]  131.31,99.87 180 top
R116  4.7k  [0603]  131.31,97.87 180 top
R117  1k  [0603]  132.31,94.87 90 top
R118  1k  [0603]  130.31,94.87 90 top
R119  1k  [0603]  136.31,94.87 90 top
R120  1k  [0603]  134.31,94.87 90 top
R121  10k  [0402-TIGHT]  134.31,114.17 0 top
R122  10k  [0402-TIGHT]  136.31,101.87 270 top
R123  10k  [0402-TIGHT]  134.31,101.87 270 top
R124  100k  [0603]  126.31,109.37 180 top
R125  10k  [0603]  126.31,115.37 0 top
R126  100k  [0603]  126.31,112.37 180 top
S1  RESET  [TACTILE_SWITCH_SMD_4.6X2.8MM]  73.65,40.86 180 top
S2  RESET  [TACTILE_SWITCH_SMD_4.6X2.8MM]  123.31,40.86 180 top
S3  RESET  [TACTILE_SWITCH_SMD_4.6X2.8MM]  24,40.86 180 top
S4  RESET  [TACTILE_SWITCH_SMD_4.6X2.8MM]  24,81.37 180 top
S5  RESET  [TACTILE_SWITCH_SMD_4.6X2.8MM]  73.65,81.37 180 top
S6  RESET  [TACTILE_SWITCH_SMD_4.6X2.8MM]  123.31,81.37 180 top
S7  RESET  [TACTILE_SWITCH_SMD_4.6X2.8MM]  24,121.87 180 top
S8  RESET  [TACTILE_SWITCH_SMD_4.6X2.8MM]  73.65,121.87 180 top
S9  RESET  [TACTILE_SWITCH_SMD_4.6X2.8MM]  123.31,121.87 180 top
TP1  [PAD.03X.05]  50.29,42.42 0 bottom
TP2  [PAD.03X.05]  47.75,42.42 0 bottom
TP3  TEST-POINT3X5  [PAD.03X.05]  54.1,37.08 0 bottom
TP4  TEST-POINT3X5  [PAD.03X.05]  54.1,34.54 0 bottom
TP5  TEST-POINT3X5  [PAD.03X.05]  19.81,39.88 0 bottom
TP6  TEST-POINT3X5  [PAD.03X.05]  19.81,37.34 0 bottom
TP7  TEST-POINT3X5  [PAD.03X.05]  33.9,38.46 0 bottom
TP8  [PAD.03X.05]  99.94,42.42 0 bottom
TP9  [PAD.03X.05]  97.4,42.42 0 bottom
TP10  TEST-POINT3X5  [PAD.03X.05]  103.75,37.08 0 bottom
TP11  TEST-POINT3X5  [PAD.03X.05]  103.75,34.54 0 bottom
TP12  TEST-POINT3X5  [PAD.03X.05]  69.46,39.88 0 bottom
TP13  TEST-POINT3X5  [PAD.03X.05]  69.46,37.34 0 bottom
TP14  TEST-POINT3X5  [PAD.03X.05]  83.55,38.46 0 bottom
TP15  [PAD.03X.05]  149.6,42.42 0 bottom
TP16  [PAD.03X.05]  147.06,42.42 0 bottom
TP17  TEST-POINT3X5  [PAD.03X.05]  153.41,37.08 0 bottom
TP18  TEST-POINT3X5  [PAD.03X.05]  153.41,34.54 0 bottom
TP19  TEST-POINT3X5  [PAD.03X.05]  119.12,39.88 0 bottom
TP20  TEST-POINT3X5  [PAD.03X.05]  119.12,37.34 0 bottom
TP21  TEST-POINT3X5  [PAD.03X.05]  133.21,38.46 0 bottom
TP22  [PAD.03X.05]  50.29,82.93 0 bottom
TP23  [PAD.03X.05]  47.75,82.93 0 bottom
TP24  TEST-POINT3X5  [PAD.03X.05]  54.1,77.59 0 bottom
TP25  TEST-POINT3X5  [PAD.03X.05]  54.1,75.05 0 bottom
TP26  TEST-POINT3X5  [PAD.03X.05]  19.81,80.39 0 bottom
TP27  TEST-POINT3X5  [PAD.03X.05]  19.81,77.85 0 bottom
TP28  TEST-POINT3X5  [PAD.03X.05]  33.9,78.97 0 bottom
TP29  [PAD.03X.05]  99.94,82.93 0 bottom
TP30  [PAD.03X.05]  97.4,82.93 0 bottom
TP31  TEST-POINT3X5  [PAD.03X.05]  103.75,77.59 0 bottom
TP32  TEST-POINT3X5  [PAD.03X.05]  103.75,75.05 0 bottom
TP33  TEST-POINT3X5  [PAD.03X.05]  69.46,80.39 0 bottom
TP34  TEST-POINT3X5  [PAD.03X.05]  69.46,77.85 0 bottom
TP35  TEST-POINT3X5  [PAD.03X.05]  83.55,78.97 0 bottom
TP36  [PAD.03X.05]  149.6,82.93 0 bottom
TP37  [PAD.03X.05]  147.06,82.93 0 bottom
TP38  TEST-POINT3X5  [PAD.03X.05]  153.41,77.59 0 bottom
TP39  TEST-POINT3X5  [PAD.03X.05]  153.41,75.05 0 bottom
TP40  TEST-POINT3X5  [PAD.03X.05]  119.12,80.39 0 bottom
TP41  TEST-POINT3X5  [PAD.03X.05]  119.12,77.85 0 bottom
TP42  TEST-POINT3X5  [PAD.03X.05]  133.21,78.97 0 bottom
TP43  [PAD.03X.05]  50.29,123.43 0 bottom
TP44  [PAD.03X.05]  47.75,123.43 0 bottom
TP45  TEST-POINT3X5  [PAD.03X.05]  54.1,118.1 0 bottom
TP46  TEST-POINT3X5  [PAD.03X.05]  54.1,115.56 0 bottom
TP47  TEST-POINT3X5  [PAD.03X.05]  19.81,120.89 0 bottom
TP48  TEST-POINT3X5  [PAD.03X.05]  19.81,118.35 0 bottom
TP49  TEST-POINT3X5  [PAD.03X.05]  33.9,119.48 0 bottom
TP50  [PAD.03X.05]  99.94,123.43 0 bottom
TP51  [PAD.03X.05]  97.4,123.43 0 bottom
TP52  TEST-POINT3X5  [PAD.03X.05]  103.75,118.1 0 bottom
TP53  TEST-POINT3X5  [PAD.03X.05]  103.75,115.56 0 bottom
TP54  TEST-POINT3X5  [PAD.03X.05]  69.46,120.89 0 bottom
TP55  TEST-POINT3X5  [PAD.03X.05]  69.46,118.35 0 bottom
TP56  TEST-POINT3X5  [PAD.03X.05]  83.55,119.48 0 bottom
TP57  [PAD.03X.05]  149.6,123.43 0 bottom
TP58  [PAD.03X.05]  147.06,123.43 0 bottom
TP59  TEST-POINT3X5  [PAD.03X.05]  153.41,118.1 0 bottom
TP60  TEST-POINT3X5  [PAD.03X.05]  153.41,115.56 0 bottom
TP61  TEST-POINT3X5  [PAD.03X.05]  119.12,120.89 0 bottom
TP62  TEST-POINT3X5  [PAD.03X.05]  119.12,118.35 0 bottom
TP63  TEST-POINT3X5  [PAD.03X.05]  133.21,119.48 0 bottom
U1  LIS2DH12  [LGA-12-LISDH12]  85.65,17.86 0 top
U2  LIS2DH12  [LGA-12-LISDH12]  36,17.86 0 top
U3  1.8V  [SOT23-5]  35,35.86 0 top
U4  1.8V  [SOT23-5]  84.65,35.86 0 top
U5  ARTEMIS_MODULESMD  [ARTEMIS_FP]  51,26.86 0 top
U6  ARTEMIS_MODULESMD  [ARTEMIS_FP]  100.65,26.86 0 top
U7  LIS2DH12  [LGA-12-LISDH12]  135.31,17.86 0 top
U8  1.8V  [SOT23-5]  134.31,35.86 0 top
U9  ARTEMIS_MODULESMD  [ARTEMIS_FP]  150.31,26.86 0 top
U10  LIS2DH12  [LGA-12-LISDH12]  36,58.37 0 top
U11  1.8V  [SOT23-5]  35,76.37 0 top
U12  ARTEMIS_MODULESMD  [ARTEMIS_FP]  51,67.37 0 top
U13  LIS2DH12  [LGA-12-LISDH12]  85.65,58.37 0 top
U14  1.8V  [SOT23-5]  84.65,76.37 0 top
U15  ARTEMIS_MODULESMD  [ARTEMIS_FP]  100.65,67.37 0 top
U16  LIS2DH12  [LGA-12-LISDH12]  135.31,58.37 0 top
U17  1.8V  [SOT23-5]  134.31,76.37 0 top
U18  ARTEMIS_MODULESMD  [ARTEMIS_FP]  150.31,67.37 0 top
U19  LIS2DH12  [LGA-12-LISDH12]  36,98.87 0 top
U20  1.8V  [SOT23-5]  35,116.87 0 top
U21  ARTEMIS_MODULESMD  [ARTEMIS_FP]  51,107.87 0 top
U22  LIS2DH12  [LGA-12-LISDH12]  85.65,98.87 0 top
U23  1.8V  [SOT23-5]  84.65,116.87 0 top
U24  ARTEMIS_MODULESMD  [ARTEMIS_FP]  100.65,107.87 0 top
U25  LIS2DH12  [LGA-12-LISDH12]  135.31,98.87 0 top
U26  1.8V  [SOT23-5]  134.31,116.87 0 top
U27  ARTEMIS_MODULESMD  [ARTEMIS_FP]  150.31,107.87 0 top
U$1  [MIC00]  16.9,39.36 0 top
U$2  [BLK2]  20.57,19.18 0 top
U$3  [GND0]  49.66,10.67 45 top
U$4  [VDD1]  38.86,11.68 90 top
U$5  [#453]  46.48,11.68 90 top
U$6  [#A312]  43.94,11.68 90 top
U$7  [A161]  41.4,11.68 90 top
U$8  [MIC10]  17,14.46 0 top
U$9  [VDD1]  38.86,11.68 90 bottom
U$10  [A161]  41.4,11.68 90 bottom
U$11  [#A312]  43.94,11.68 90 bottom
U$12  [#453]  46.48,11.68 90 bottom
U$13  [#444]  49.02,11.68 90 bottom
U$14  [GND0]  49.66,10.67 135 bottom
U$15  [EDGE_20]  32.89,27.43 0 top
U$16  [372]  37,6.56 90 top
U$17  [GND0]  99.31,10.67 45 top
U$18  [VDD1]  88.51,11.68 90 top
U$19  [QWIIC_COPYRIGHT_SMALL]  52.9,40.66 0 top
U$20  [CAMERA3]  44.45,45.21 0 top
U$21  [POWEREDBY_TF#JPG]  48.6,19.06 0 top
U$22  [VDD1]  88.51,11.68 90 bottom
U$23  [171]  35,6.76 90 top
U$24  [GND0]  99.31,10.67 135 bottom
U$25  [POWEREDBY_TF#JPG]  29.34,13.08 0 bottom
U$26  [182]  32.9,6.76 90 top
U$27  [RST15]  21.7,43.46 0 top
U$28  [GRN1]  20.57,34.54 0 top
U$29  [SFE_LOGO_NAME_.1]  40.64,42.86 0 bottom
U$30  [OSHW-LOGO-S]  18.64,13.86 0 bottom
U$31  [193]  31,6.76 90 top
U$32  [EDGE_20]  44.54,40.86 0 bottom
U$33  [RST15]  71.35,43.46 0 top
U$34  [BLK2]  70.23,19.18 0 top
U$35  [GRN1]  70.23,34.54 0 top
U$36  [#444]  49.02,11.68 90 top
U$37  [372]  86.65,6.56 90 top
U$38  [QWIIC_COPYRIGHT_SMALL]  102.55,40.66 0 top
U$39  [CAMERA3]  94.1,45.21 0 top
U$40  [POWEREDBY_TF#JPG]  98.25,19.06 0 top
U$41  [MIC00]  66.55,39.36 0 top
U$42  [POWEREDBY_TF#JPG]  78.99,13.08 0 bottom
U$43  [SFE_LOGO_NAME_.1]  90.29,42.86 0 bottom
U$44  [OSHW-LOGO-S]  68.29,13.86 0 bottom
U$45  [#444]  98.67,11.68 90 top
U$46  [#453]  96.13,11.68 90 top
U$47  [#A312]  93.59,11.68 90 top
U$48  [A161]  91.05,11.68 90 top
U$49  [MIC10]  66.65,14.46 0 top
U$50  [A161]  91.05,11.68 90 bottom
U$51  [#A312]  93.59,11.68 90 bottom
U$52  [#453]  96.13,11.68 90 bottom
U$53  [#444]  98.67,11.68 90 bottom
U$54  [EDGE_20]  94.19,40.86 0 bottom
U$55  [171]  84.65,6.76 90 top
U$56  [182]  82.55,6.76 90 top
U$57  [193]  80.65,6.76 90 top
U$58  [EDGE_20]  82.54,27.43 0 top
U$59  [GND0]  148.96,10.67 45 top
U$60  [VDD1]  138.17,11.68 90 top
U$61  [VDD1]  138.17,11.68 90 bottom
U$62  [GND0]  148.96,10.67 135 bottom
U$63  [RST15]  121.01,43.46 0 top
U$64  [BLK2]  119.88,19.18 0 top
U$65  [GRN1]  119.88,34.54 0 top
U$66  [372]  136.31,6.56 90 top
U$67  [QWIIC_COPYRIGHT_SMALL]  152.21,40.66 0 top
U$68  [CAMERA3]  143.75,45.21 0 top
U$69  [POWEREDBY_TF#JPG]  147.91,19.06 0 top
U$70  [MIC00]  116.21,39.36 0 top
U$71  [POWEREDBY_TF#JPG]  128.64,13.08 0 bottom
U$72  [SFE_LOGO_NAME_.1]  139.95,42.86 0 bottom
U$73  [OSHW-LOGO-S]  117.95,13.86 0 bottom
U$74  [#444]  148.33,11.68 90 top
U$75  [#453]  145.79,11.68 90 top
U$76  [#A312]  143.25,11.68 90 top
U$77  [A161]  140.71,11.68 90 top
U$78  [MIC10]  116.31,14.46 0 top
U$79  [A161]  140.71,11.68 90 bottom
U$80  [#A312]  143.25,11.68 90 bottom
U$81  [#453]  145.79,11.68 90 bottom
U$82  [#444]  148.33,11.68 90 bottom
U$83  [EDGE_20]  143.85,40.86 0 bottom
U$84  [171]  134.31,6.76 90 top
U$85  [182]  132.21,6.76 90 top
U$86  [193]  130.31,6.76 90 top
U$87  [EDGE_20]  132.2,27.43 0 top
U$88  [GND0]  49.66,51.18 45 top
U$89  [VDD1]  38.86,52.19 90 top
U$90  [VDD1]  38.86,52.19 90 bottom
U$91  [GND0]  49.66,51.18 135 bottom
U$92  [RST15]  21.7,83.97 0 top
U$93  [BLK2]  20.57,59.68 0 top
U$94  [GRN1]  20.57,75.05 0 top
U$95  [372]  37,47.07 90 top
U$96  [QWIIC_COPYRIGHT_SMALL]  52.9,81.17 0 top
U$97  [CAMERA3]  44.45,85.72 0 top
U$98  [POWEREDBY_TF#JPG]  48.6,59.57 0 top
U$99  [MIC00]  16.9,79.87 0 top
U$100  [POWEREDBY_TF#JPG]  29.34,53.59 0 bottom
U$101  [SFE_LOGO_NAME_.1]  40.64,83.37 0 bottom
U$102  [OSHW-LOGO-S]  18.64,54.37 0 bottom
U$103  [#444]  49.02,52.19 90 top
U$104  [#453]  46.48,52.19 90 top
U$105  [#A312]  43.94,52.19 90 top
U$106  [A161]  41.4,52.19 90 top
U$107  [MIC10]  17,54.97 0 top
U$108  [A161]  41.4,52.19 90 bottom
U$109  [#A312]  43.94,52.19 90 bottom
U$110  [#453]  46.48,52.19 90 bottom
U$111  [#444]  49.02,52.19 90 bottom
U$112  [EDGE_20]  44.54,81.37 0 bottom
U$113  [171]  35,47.27 90 top
U$114  [182]  32.9,47.27 90 top
U$115  [193]  31,47.27 90 top
U$116  [EDGE_20]  32.89,67.94 0 top
U$117  [GND0]  99.31,51.18 45 top
U$118  [VDD1]  88.51,52.19 90 top
U$119  [VDD1]  88.51,52.19 90 bottom
U$120  [GND0]  99.31,51.18 135 bottom
U$121  [RST15]  71.35,83.97 0 top
U$122  [BLK2]  70.23,59.68 0 top
U$123  [GRN1]  70.23,75.05 0 top
U$124  [372]  86.65,47.07 90 top
U$125  [QWIIC_COPYRIGHT_SMALL]  102.55,81.17 0 top
U$126  [CAMERA3]  94.1,85.72 0 top
U$127  [POWEREDBY_TF#JPG]  98.25,59.57 0 top
U$128  [MIC00]  66.55,79.87 0 top
U$129  [POWEREDBY_TF#JPG]  78.99,53.59 0 bottom
U$130  [SFE_LOGO_NAME_.1]  90.29,83.37 0 bottom
U$131  [OSHW-LOGO-S]  68.29,54.37 0 bottom
U$132  [#444]  98.67,52.19 90 top
U$133  [#453]  96.13,52.19 90 top
U$134  [#A312]  93.59,52.19 90 top
U$135  [A161]  91.05,52.19 90 top
U$136  [MIC10]  66.65,54.97 0 top
U$137  [A161]  91.05,52.19 90 bottom
U$138  [#A312]  93.59,52.19 90 bottom
U$139  [#453]  96.13,52.19 90 bottom
U$140  [#444]  98.67,52.19 90 bottom
U$141  [EDGE_20]  94.19,81.37 0 bottom
U$142  [171]  84.65,47.27 90 top
U$143  [182]  82.55,47.27 90 top
U$144  [193]  80.65,47.27 90 top
U$145  [EDGE_20]  82.54,67.94 0 top
U$146  [GND0]  148.96,51.18 45 top
U$147  [VDD1]  138.17,52.19 90 top
U$148  [VDD1]  138.17,52.19 90 bottom
U$149  [GND0]  148.96,51.18 135 bottom
U$150  [RST15]  121.01,83.97 0 top
U$151  [BLK2]  119.88,59.68 0 top
U$152  [GRN1]  119.88,75.05 0 top
U$153  [372]  136.31,47.07 90 top
U$154  [QWIIC_COPYRIGHT_SMALL]  152.21,81.17 0 top
U$155  [CAMERA3]  143.75,85.72 0 top
U$156  [POWEREDBY_TF#JPG]  147.91,59.57 0 top
U$157  [MIC00]  116.21,79.87 0 top
U$158  [POWEREDBY_TF#JPG]  128.64,53.59 0 bottom
U$159  [SFE_LOGO_NAME_.1]  139.95,83.37 0 bottom
U$160  [OSHW-LOGO-S]  117.95,54.37 0 bottom
U$161  [#444]  148.33,52.19 90 top
U$162  [#453]  145.79,52.19 90 top
U$163  [#A312]  143.25,52.19 90 top
U$164  [A161]  140.71,52.19 90 top
U$165  [MIC10]  116.31,54.97 0 top
U$166  [A161]  140.71,52.19 90 bottom
U$167  [#A312]  143.25,52.19 90 bottom
U$168  [#453]  145.79,52.19 90 bottom
U$169  [#444]  148.33,52.19 90 bottom
U$170  [EDGE_20]  143.85,81.37 0 bottom
U$171  [171]  134.31,47.27 90 top
U$172  [182]  132.21,47.27 90 top
U$173  [193]  130.31,47.27 90 top
U$174  [EDGE_20]  132.2,67.94 0 top
U$175  [GND0]  49.66,91.68 45 top
U$176  [VDD1]  38.86,92.7 90 top
U$177  [VDD1]  38.86,92.7 90 bottom
U$178  [GND0]  49.66,91.68 135 bottom
U$179  [RST15]  21.7,124.47 0 top
U$180  [BLK2]  20.57,100.19 0 top
U$181  [GRN1]  20.57,115.56 0 top
U$182  [372]  37,87.57 90 top
U$183  [QWIIC_COPYRIGHT_SMALL]  52.9,121.67 0 top
U$184  [CAMERA3]  44.45,126.23 0 top
U$185  [POWEREDBY_TF#JPG]  48.6,100.07 0 top
U$186  [MIC00]  16.9,120.37 0 top
U$187  [POWEREDBY_TF#JPG]  29.34,94.1 0 bottom
U$188  [SFE_LOGO_NAME_.1]  40.64,123.87 0 bottom
U$189  [OSHW-LOGO-S]  18.64,94.87 0 bottom
U$190  [#444]  49.02,92.7 90 top
U$191  [#453]  46.48,92.7 90 top
U$192  [#A312]  43.94,92.7 90 top
U$193  [A161]  41.4,92.7 90 top
U$194  [MIC10]  17,95.47 0 top
U$195  [A161]  41.4,92.7 90 bottom
U$196  [#A312]  43.94,92.7 90 bottom
U$197  [#453]  46.48,92.7 90 bottom
U$198  [#444]  49.02,92.7 90 bottom
U$199  [EDGE_20]  44.54,121.87 0 bottom
U$200  [171]  35,87.77 90 top
U$201  [182]  32.9,87.77 90 top
U$202  [193]  31,87.77 90 top
U$203  [EDGE_20]  32.89,108.45 0 top
U$204  [GND0]  99.31,91.68 45 top
U$205  [VDD1]  88.51,92.7 90 top
U$206  [VDD1]  88.51,92.7 90 bottom
U$207  [GND0]  99.31,91.68 135 bottom
U$208  [RST15]  71.35,124.47 0 top
U$209  [BLK2]  70.23,100.19 0 top
U$210  [GRN1]  70.23,115.56 0 top
U$211  [372]  86.65,87.57 90 top
U$212  [QWIIC_COPYRIGHT_SMALL]  102.55,121.67 0 top
U$213  [CAMERA3]  94.1,126.23 0 top
U$214  [POWEREDBY_TF#JPG]  98.25,100.07 0 top
U$215  [MIC00]  66.55,120.37 0 top
U$216  [POWEREDBY_TF#JPG]  78.99,94.1 0 bottom
U$217  [SFE_LOGO_NAME_.1]  90.29,123.87 0 bottom
U$218  [OSHW-LOGO-S]  68.29,94.87 0 bottom
U$219  [#444]  98.67,92.7 90 top
U$220  [#453]  96.13,92.7 90 top
U$221  [#A312]  93.59,92.7 90 top
U$222  [A161]  91.05,92.7 90 top
U$223  [MIC10]  66.65,95.47 0 top
U$224  [A161]  91.05,92.7 90 bottom
U$225  [#A312]  93.59,92.7 90 bottom
U$226  [#453]  96.13,92.7 90 bottom
U$227  [#444]  98.67,92.7 90 bottom
U$228  [EDGE_20]  94.19,121.87 0 bottom
U$229  [171]  84.65,87.77 90 top
U$230  [182]  82.55,87.77 90 top
U$231  [193]  80.65,87.77 90 top
U$232  [EDGE_20]  82.54,108.45 0 top
U$233  [GND0]  148.96,91.68 45 top
U$234  [VDD1]  138.17,92.7 90 top
U$235  [VDD1]  138.17,92.7 90 bottom
U$236  [GND0]  148.96,91.68 135 bottom
U$237  [RST15]  121.01,124.47 0 top
U$238  [BLK2]  119.88,100.19 0 top
U$239  [GRN1]  119.88,115.56 0 top
U$240  [372]  136.31,87.57 90 top
U$241  [QWIIC_COPYRIGHT_SMALL]  152.21,121.67 0 top
U$242  [CAMERA3]  143.75,126.23 0 top
U$243  [POWEREDBY_TF#JPG]  147.91,100.07 0 top
U$244  [MIC00]  116.21,120.37 0 top
U$245  [POWEREDBY_TF#JPG]  128.64,94.1 0 bottom
U$246  [SFE_LOGO_NAME_.1]  139.95,123.87 0 bottom
U$247  [OSHW-LOGO-S]  117.95,94.87 0 bottom
U$248  [#444]  148.33,92.7 90 top
U$249  [#453]  145.79,92.7 90 top
U$250  [#A312]  143.25,92.7 90 top
U$251  [A161]  140.71,92.7 90 top
U$252  [MIC10]  116.31,95.47 0 top
U$253  [A161]  140.71,92.7 90 bottom
U$254  [#A312]  143.25,92.7 90 bottom
U$255  [#453]  145.79,92.7 90 bottom
U$256  [#444]  148.33,92.7 90 bottom
U$257  [EDGE_20]  143.85,121.87 0 bottom
U$258  [171]  134.31,87.77 90 top
U$259  [182]  132.21,87.77 90 top
U$260  [193]  130.31,87.77 90 top
U$261  [EDGE_20]  132.2,108.45 0 top
Y1  32.768kHz  [CRYSTAL-SMD-3.2X1.5MM]  90.65,23.86 270 top
Y2  32.768kHz  [CRYSTAL-SMD-3.2X1.5MM]  41,23.86 270 top
Y3  32.768kHz  [CRYSTAL-SMD-3.2X1.5MM]  140.31,23.86 270 top
Y4  32.768kHz  [CRYSTAL-SMD-3.2X1.5MM]  41,64.37 270 top
Y5  32.768kHz  [CRYSTAL-SMD-3.2X1.5MM]  90.65,64.37 270 top
Y6  32.768kHz  [CRYSTAL-SMD-3.2X1.5MM]  140.31,64.37 270 top
Y7  32.768kHz  [CRYSTAL-SMD-3.2X1.5MM]  41,104.87 270 top
Y8  32.768kHz  [CRYSTAL-SMD-3.2X1.5MM]  90.65,104.87 270 top
Y9  32.768kHz  [CRYSTAL-SMD-3.2X1.5MM]  140.31,104.87 270 top

## Library data of the parts
BT1-BT9 = SparkFun-Batteries
C1 C12 C18 C20 C24 C28 C32 C38 C42 C46 C52 C56 C60 C66 C70 C74 C80 C84 C88 C94 C98 C102 C108 C112 C116 C122 C126 = ambiq; PROD_ID: CAP-12416
C2 C25 C39 C53 C67 C81 C95 C109 C123 = SparkFun-Capacitors; PROD_ID: CAP-12416
C3 C5 C9 C10 C29 C30 C43 C44 C57 C58 C71 C72 C85 C86 C99 C100 C113 C114 = ambiq; PROD_ID: CAP-13063
C4 C8 C21 C26 C31 C40 C45 C54 C59 C68 C73 C82 C87 C96 C101 C110 C115 C124 = SparkFun-Capacitors; PROD_ID: CAP-11015
C6 C15 C35 C49 C63 C77 C91 C105 C119 = SparkFun-Capacitors; PROD_ID: CAP-08604
C7 C16 C36 C50 C64 C78 C92 C106 C120 = SparkFun-Capacitors; PROD_ID: CAP-07888
C11 C27 C41 C55 C69 C83 C97 C111 C125 = SparkFun-Capacitors; PROD_ID: CAP-12417
C13 C14 C22 C23 C33 C34 C47 C48 C61 C62 C75 C76 C89 C90 C103 C104 C117 C118 = ambiq; PROD_ID: CAP-12417
C17 C19 C37 C51 C65 C79 C93 C107 C121 = SparkFun-Capacitors; PROD_ID: CAP-07886
D1 D2 D7 D8 D13 D14 D19 D20 D25 D26 D31 D32 D37 D38 D43 D44 D49 D50 = SparkFun-DiscreteSemi; PROD_ID: DIO-11623
D3 D10 D16 D22 D28 D34 D40 D46 D52 = SparkFun-LED; PROD_ID: DIO-00819
D4 D9 D15 D21 D27 D33 D39 D45 D51 = SparkFun-LED; PROD_ID: DIO-08575
D5 D11 D17 D23 D29 D35 D41 D47 D53 = SparkFun-LED; PROD_ID: DIO-09003
D6 D12 D18 D24 D30 D36 D42 D48 D54 = SparkFun-LED; PROD_ID: DIO-00821
E1-E18 = SparkFun-Sensors; PROD_ID: IC-14361
E$1-E$4 FD1-FD36 FRAME1 FRAME3 FRAME5 FRAME7 FRAME9 FRAME11 FRAME13 FRAME15 FRAME17 LOGO1-LOGO18 U$29 U$30 U$43 U$44 U$72 U$73 U$101 U$102 U$130 U$131 U$159 U$160 U$188 U$189 U$217 U$218 U$246 U$247 = SparkFun-Aesthetics
E$5 E$6 = SparkFun-Retired
FRAME2 FRAME4 FRAME6 FRAME8 FRAME10 FRAME12 FRAME14 FRAME16 FRAME18 = SparkFun-Aesthetics; DESIGNER: Nobody; VERSION: x01
H1-H36 = SparkFun-Hardware
J1 J3 J5 J8 J9 J11 J14 J15 J17 J20 J21 J23 J26 J27 J29 J32 J33 J35 J38 J39 J41 J44 J45 J47 J50 J51 J53 TP1-TP63 = SparkFun-Connectors
J2 J6 J13 J19 J25 J31 J37 J43 J49 = SparkFun-Connectors; PROD_ID: CONN-08971
J4 J10 J16 J22 J28 J34 J40 J46 J52 = SparkFun-Connectors; PROD_ID: CONN-13694
J7 J12 J18 J24 J30 J36 J42 J48 J54 = SparkFun-Connectors; DIGIKEY: 609-4320-2-ND; PROD_ID: CONN-14233
R1-R4 R12-R15 R24 R30-R32 R43-R46 R57-R60 R71-R74 R85-R88 R99-R102 R113-R116 = SparkFun-Resistors; PROD_ID: RES-07857
R5-R10 R16 R17 R33-R36 R47-R50 R61-R64 R75-R78 R89-R92 R103-R106 R117-R120 = SparkFun-Resistors; PROD_ID: RES-07856
R11 R18-R20 R25 R26 R37-R39 R51-R53 R65-R67 R79-R81 R93-R95 R107-R109 R121-R123 = SparkFun-Resistors; PROD_ID: RES-14241
R21 R23 R27 R29 R40 R42 R54 R56 R68 R70 R82 R84 R96 R98 R110 R112 R124 R126 = SparkFun-Resistors; PROD_ID: RES-07828
R22 R28 R41 R55 R69 R83 R97 R111 R125 = SparkFun-Resistors; PROD_ID: RES-00824
S1-S9 = SparkFun-Switches; PROD_ID: SWCH-13065
U1 U2 U7 U10 U13 U16 U19 U22 U25 = SparkFun-Sensors; DIGIKEY: 497-14851-2-ND; PROD_ID: IC-14229
U3 U4 U8 U11 U14 U17 U20 U23 U26 = SparkFun-IC-Power; PROD_ID: VREG-14239
U5 U6 U9 U12 U15 U18 U21 U24 U27 = SparkFun-IC-Microcontroller; PROD_ID: SUB-14415
U$1-U$4 U$9 U$14 U$16-U$18 U$20 U$22 U$24 U$27 U$28 U$33-U$35 U$37 U$39 U$41 U$59-U$66 U$68 U$70 U$88-U$95 U$97 U$99 U$117-U$124 U$126 U$128 U$146-U$153 U$155 U$157 U$175-U$182 U$184 U$186 U$204-U$211 U$213 U$215 U$233-U$240 U$242 U$244 = buzzard_labels
U$5-U$8 U$10-U$13 U$36 U$45-U$53 U$74-U$82 U$103-U$111 U$132-U$140 U$161-U$169 U$190-U$198 U$219-U$227 U$248-U$256 = buzzard_labels (9)
U$15 U$32 U$54 U$58 U$83 U$87 U$112 U$116 U$141 U$145 U$170 U$174 U$199 U$203 U$228 U$232 U$257 U$261 = buzzard_labels (11)
U$19 U$38 U$67 U$96 U$125 U$154 U$183 U$212 U$241 = Labels
U$21 U$25 U$40 U$42 U$69 U$71 U$98 U$100 U$127 U$129 U$156 U$158 U$185 U$187 U$214 U$216 U$243 U$245 = PoweredBy_TF#jpg
U$23 U$55 U$84 U$113 U$142 U$171 U$200 U$229 U$258 = buzzard_labels (13)
U$26 U$31 U$56 U$57 U$85 U$86 U$114 U$115 U$143 U$144 U$172 U$173 U$201 U$202 U$230 U$231 U$259 U$260 = buzzard_labels (14)
Y1-Y9 = SparkFun-Clocks; PROD_ID: XTAL-13062